# EAGLE board HotFireBoard (EAGLE 9.0.1)

Size 130.54 x 96.19 mm. Coordinates in mm from the lower left corner, seen from the top.
Outline: 0,0 130.54,0 130.54,96.19 0,96.19 0,0
Copper layers (1*16): Top 0.035mm / dielectric 1.5mm / Bottom 0.035mm
Design rules "default": minimum track width 6mil, minimum drill 0.35mm, track to track 6mil, track to pad 6mil, pad to pad 6mil, via to via 6mil, smd to smd 6mil, copper to edge 40mil, drill to drill 6mil, minimum pad ring 10mil, minimum via ring 8mil, stop-mask expansion 4mil, vias tented up to drill 0mil, thermal gap 10mil
Net classes: 1 16mil: width 0.254 mm, drill 0.254 mm, clearance 0.127 mm; 2 24mil: width 0.254 mm, drill 0.254 mm, clearance 0.127 mm; 3 32mil: width 0.254 mm, drill 0.254 mm, clearance 0.127 mm

## Footprints (pad centres in the part's own frame; a part is rotated, then mirrored left to right if it is on the bottom)
SCREWTERMINAL-5MM-2 = drill 1.3 pad 2.032 square: 1 0,0 | drill 1.3 pad 2.032: 2 5,0
0805 = smd 1.3 x 1.5: 1 -0.95,0; 2 0.95,0
PANASONIC_D = smd 3 x 1.4: + 2.4,0; - -2.4,0
0603 = smd 0.762 x 0.762: 1 -0.762,0; 2 0.762,0
PANASONIC_D' = smd 3.556 x 1.4: + 2.654,0; - -2.654,0
0603' = smd 1.016 x 1.016: 1 -0.953,0; 2 0.953,0
EIA3216 = smd 1.4 x 1.6: A 1.4,0; C -1.4,0
PN61729 = drill 0.95 octagon: 1 1.25,4.71; 2 -1.25,4.71; 3 -1.25,2.71; 4 1.25,2.71 | drill 2.2: P$1 -6.02,0; P$2 6.02,0
SOT23 = smd 1 x 1.4: 1 -0.95,-1.1; 2 0.95,-1.1; 3 0,1.1
SOD-123 = smd 1.2 x 0.7: A 1.85,0; C -1.85,0
DO214AB = smd 2.5 x 3.3: A 3.4,0; C -3.4,0
SHK20L = drill 1.321 pad 2.54 long: 1A -10.414,0; 1B -5.334,0; 2A 10.414,0; 2B 5.334,0
0603'' = smd 1.1 x 1: 1 -0.85,0; 2 0.85,0
2,8 = hole 2.8: 0,0
TQFP100 = smd 1.5 x 0.35: 1 -8,6; 2 -8,5.5; 3 -8,5; 4 -8,4.5; 5 -8,4; 6 -8,3.5; 7 -8,3; 8 -8,2.5; 9 -8,2; 10 -8,1.5; 11 -8,1; 12 -8,0.5; 13 -8,0; 14 -8,-0.5; 15 -8,-1; 16 -8,-1.5; 17 -8,-2; 18 -8,-2.5; 19 -8,-3; 20 -8,-3.5; 21 -8,-4; 22 -8,-4.5; 23 -8,-5; 24 -8,-5.5; 25 -8,-6; 51 8,-6; 52 8,-5.5; 53 8,-5; 54 8,-4.5; 55 8,-4; 56 8,-3.5; 57 8,-3; 58 8,-2.5; 59 8,-2; 60 8,-1.5; 61 8,-1; 62 8,-0.5; 63 8,0; 64 8,0.5; 65 8,1; 66 8,1.5; 67 8,2; 68 8,2.5; 69 8,3; 70 8,3.5; 71 8,4; 72 8,4.5; 73 8,5; 74 8,5.5; 75 8,6 | smd 0.35 x 1.5: 26 -6,-8; 27 -5.5,-8; 28 -5,-8; 29 -4.5,-8; 30 -4,-8; 31 -3.5,-8; 32 -3,-8; 33 -2.5,-8; 34 -2,-8; 35 -1.5,-8; 36 -1,-8; 37 -0.5,-8; 38 0,-8; 39 0.5,-8; 40 1,-8; 41 1.5,-8; 42 2,-8; 43 2.5,-8; 44 3,-8; 45 3.5,-8; 46 4,-8; 47 4.5,-8; 48 5,-8; 49 5.5,-8; 50 6,-8; 76 6,8; 77 5.5,8; 78 5,8; 79 4.5,8; 80 4,8; 81 3.5,8; 82 3,8; 83 2.5,8; 84 2,8; 85 1.5,8; 86 1,8; 87 0.5,8; 88 0,8; 89 -0.5,8; 90 -1,8; 91 -1.5,8; 92 -2,8; 93 -2.5,8; 94 -3,8; 95 -3.5,8; 96 -4,8; 97 -4.5,8; 98 -5,8; 99 -5.5,8; 100 -6,8
SO08 = smd 0.66 x 2.032: 1 -1.905,-3.073; 2 -0.635,-3.073; 3 0.635,-3.073; 4 1.905,-3.073; 5 1.905,3.073; 6 0.635,3.073; 7 -0.635,3.073; 8 -1.905,3.073
TO252 = smd 1 x 1.6: 1 -2.28,-4.8; 2 2.28,-4.8 | smd 5.4 x 6.2: 3 0,2.5
W5500 = smd 1.5 x 0.3: 1 -4.45,2.75; 2 -4.45,2.25; 3 -4.45,1.75; 4 -4.45,1.25; 5 -4.45,0.75; 6 -4.45,0.25; 7 -4.45,-0.25; 8 -4.45,-0.75; 9 -4.45,-1.25; 10 -4.45,-1.75; 11 -4.45,-2.25; 12 -4.45,-2.75; 25 4.45,-2.75; 26 4.45,-2.25; 27 4.45,-1.75; 28 4.45,-1.25; 29 4.45,-0.75; 30 4.45,-0.25; 31 4.45,0.25; 32 4.45,0.75; 33 4.45,1.25; 34 4.45,1.75; 35 4.45,2.25; 36 4.45,2.75 | smd 0.3 x 1.5: 13 -2.75,-4.45; 14 -2.25,-4.45; 15 -1.75,-4.45; 16 -1.25,-4.45; 17 -0.75,-4.45; 18 -0.25,-4.45; 19 0.25,-4.45; 20 0.75,-4.45; 21 1.25,-4.45; 22 1.75,-4.45; 23 2.25,-4.45; 24 2.75,-4.45; 37 2.75,4.45; 38 2.25,4.45; 39 1.75,4.45; 40 1.25,4.45; 41 0.75,4.45; 42 0.25,4.45; 43 -0.25,4.45; 44 -0.75,4.45; 45 -1.25,4.45; 46 -1.75,4.45; 47 -2.25,4.45; 48 -2.75,4.45
TO263-5 = smd 1.067 x 2.159: 1 -3.404,-5.791; 2 -1.702,-5.791; 3 0,-5.791; 4 1.702,-5.791; 5 3.404,-5.791 | smd 10.8 x 10.41: 6 0,2.54
2X3 = drill 1.016 pad 1.88: 1 0,0; 2 0,2.54; 3 2.54,0; 4 2.54,2.54; 5 5.08,0; 6 5.08,2.54
2-794681-0 = drill 1 pad 1.778: 1 13.5,-1.5; 2 13.5,1.5; 3 10.5,-1.5; 4 10.5,1.5; 5 7.5,-1.5; 6 7.5,1.5; 7 4.5,-1.5; 8 4.5,1.5; 9 1.5,-1.5; 10 1.5,1.5; 11 -1.5,-1.5; 12 -1.5,1.5; 13 -4.5,-1.5; 14 -4.5,1.5; 15 -7.5,-1.5; 16 -7.5,1.5; 17 -10.5,-1.5; 18 -10.5,1.5; 19 -13.5,-1.5; 20 -13.5,1.5 | hole 2.4: 15.63,0; -15.67,0
1X04 = drill 1.016 square: 1 0,0 | drill 1.016: 2 2.54,0; 3 5.08,0; 4 7.62,0
SRR1280 = smd 5.6 x 3.1: 1 0.635,5; 2 0.635,-5
L2012C = smd 1 x 1: 1 -1,0; 2 1,0
CHIPLED_0805 = smd 1.2 x 1.2: A 0,-1.05; C 0,1.05
LED-0603 = smd 0.762 x 0.762: A -0.762,0; C 0.762,0
TO-92 = drill 0.813 pad 1.88: 1 -1.27,0; 2 0,1.905; 3 1.27,0
SOT223 = smd 1.219 x 2.235: 1 -2.311,-3.099; 2 0,-3.099; 3 2.311,-3.099 | smd 3.6 x 2.2: 4 0,3.099
M0805 = smd 1.3 x 1.6: 1 -0.95,0; 2 0.95,0
S64W = drill 0.813 long: A 2.54,1.27; E -2.54,1.27; S 0,1.27
R0603 = smd 1 x 1.1: 1 -0.85,0; 2 0.85,0
SOT89 = smd 0.8 x 1.4: 1 -1.524,-1.905; 3 1.524,-1.905 | smd 0.8 x 1.9: 2 0,-1.651 | smd 2.032 x 3.65: 4 0,0.94
DTSM-6 = smd 1.55 x 1.3: 1 -3.975,2.25; 2 3.975,2.25; 3 -3.975,-2.25; 4 3.975,-2.25
HY931147C = drill 1.63 octagon: GND1 3.05,7.745; GND2 3.05,-7.745 | drill 0.9 square: P$1 8.89,5.715 | drill 0.9: P$2 6.35,4.445; P$3 8.89,3.175; P$4 6.35,1.905; P$5 8.89,0.635; P$6 6.35,-0.635; P$7 8.89,-1.905; P$8 6.35,-3.175; P$9 8.89,-4.445; P$10 6.35,-5.715 | drill 1.016: P$11 -4.08,6.625; P$12 -4.08,4.085; P$13 -4.08,-4.085; P$14 -4.08,-6.625 | hole 3.25: 0,5.715; 0,-5.715
TACTILE_SWITCH_SMD_2PIN_TINY = smd 1.4 x 1.4: 1 -2.05,0; 2 2.05,0 | hole 0.65: 0,0.9; 0,-0.9
SSOP28DB = smd 0.348 x 1.397: 1 -4.225,-3.656; 2 -3.575,-3.656; 3 -2.925,-3.656; 4 -2.275,-3.656; 5 -1.625,-3.656; 6 -0.975,-3.656; 7 -0.325,-3.656; 8 0.325,-3.656; 9 0.975,-3.656; 10 1.625,-3.656; 11 2.275,-3.656; 12 2.925,-3.656; 13 3.575,-3.656; 14 4.225,-3.656; 15 4.225,3.656; 16 3.575,3.656; 17 2.925,3.656; 18 2.275,3.656; 19 1.625,3.656; 20 0.975,3.656; 21 0.325,3.656; 22 -0.325,3.656; 23 -0.975,3.656; 24 -1.625,3.656; 25 -2.275,3.656; 26 -2.925,3.656; 27 -3.575,3.656; 28 -4.225,3.656
MSOP10 = smd 0.25 x 1: 1 -1,-2.113; 2 -0.5,-2.113; 3 0,-2.113; 4 0.5,-2.113; 5 1,-2.113; 6 1,2.113; 7 0.5,2.113; 8 0,2.113; 9 -0.5,2.113; 10 -1,2.113
SO16 = smd 0.6 x 1.2: 1 -4.445,-2.8; 2 -3.175,-2.8; 3 -1.905,-2.8; 4 -0.635,-2.8; 5 0.635,-2.8; 6 1.905,-2.8; 7 3.175,-2.8; 8 4.445,-2.8; 9 4.445,2.8; 10 3.175,2.8; 11 1.905,2.8; 12 0.635,2.8; 13 -0.635,2.8; 14 -1.905,2.8; 15 -3.175,2.8; 16 -4.445,2.8
RESONATOR-SMD = smd 0.7 x 1.7: 1 -1.2,0; 2 0,0; 3 1.2,0
RW-SH = drill 1.5: 1 -6.1,6; 2 -6.1,-6; COM -8.1,0; NC 6.1,6; NO 6.1,-6
CRYSTAL-SMD-3X2 = smd 1.3 x 1.1: 1 -1.15,-0.9; 2 1.15,-0.9; 3 1.15,0.9; 4 -1.15,0.9

## Placement (x,y rotation side)
AUX_BATT  [SCREWTERMINAL-5MM-2]  39.37,91.44 0 top
C1  0.1uF  [0805]  38.35,48.39 180 bottom
C2  0.1uF  [0805]  38.35,46.48 180 bottom
C3  0.1uF  [0805]  38.35,44.58 180 bottom
C4  0.1uF  [0805]  75.95,42.42 90 bottom
C5  47uF  [PANASONIC_D]  22.86,68.33 90 top
C6  47uF  [PANASONIC_D]  36.58,68.33 90 top
C7  0.1uF  [0805]  8.38,39.88 270 bottom
C8  0.1uF  [0805]  14.61,77.6 90 bottom
C9  4.7uF  [0805]  20.07,83.31 0 bottom
C10  0.1uF  [0805]  20.07,81.53 0 bottom
C11  0.1uF  [0805]  58.55,36.45 0 bottom
C12  0.1uF  [0805]  66.93,36.45 0 bottom
C13  0.1uF  [0805]  74.8,36.45 0 bottom
C14  0.01uF  [0805]  109.86,23.75 270 bottom
C15  0.01uF  [0805]  98.93,23.75 90 bottom
C16  0.01uF  [0805]  89.53,28.57 90 bottom
C17  0.01uF  [0805]  80.39,23.75 90 bottom
C18  0.01uF  [0805]  71.5,23.75 90 bottom
C19  0.01uF  [0805]  61.98,23.88 90 bottom
C20  0.01uF  [0805]  52.58,24.13 90 bottom
C21  0.01uF  [0805]  43.05,24 90 bottom
C22  0.01uF  [0805]  33.4,24 90 bottom
C23  0.01uF  [0805]  16.26,11.43 90 bottom
C24  47uF  [PANASONIC_D]  29.72,68.33 90 top
C25  1uF  [0805]  70.48,48.77 90 bottom
C26  0.1uF  [0805]  19.81,21.34 270 bottom
C27  1uF  [0805]  95.89,48.64 90 bottom
C28  1uF  [0805]  95.89,44.83 90 bottom
C29  1uF  [0805]  95.89,52.58 270 top
C30  0.1uF  [0805]  87,42.55 90 bottom
C31  1uF  [0805]  83.44,48.77 90 bottom
C32  1uF  [0805]  83.44,44.96 90 bottom
C33  1uF  [0805]  83.44,52.58 270 top
C34  0.1uF  [0805]  101.47,42.67 90 bottom
C35  0.1uF  [0805]  89.03,42.55 90 bottom
C36  100nF  [0603]  84.58,36.07 270 top
C37  100uF 16V  [PANASONIC_D]  88.65,36.32 90 top
C38  100uF 16V  [PANASONIC_D]  95.25,36.32 90 top
C39  1uF  [0805]  75.95,46.23 90 bottom
C40  220uF@35V  [PANASONIC_D']  51.44,69.85 0 top
C41  220uF@35V  [PANASONIC_D']  69.85,76.83 90 top
C42  100nF  [0603']  52.83,67.31 90 bottom
C43  1uF  [0805]  72.26,52.58 270 top
C44  0.1uF  [0805]  77.85,42.42 90 bottom
C45  0.1uF  [0805]  77.47,3.05 90 bottom
C46  1uF  [0805]  66.17,48.01 90 bottom
C47  1uF  [0805]  64.26,45.97 90 bottom
C48  1uF  [0805]  60.58,52.45 270 top
C49  0.1uF  [0805]  66.17,42.42 90 bottom
C50  10uF 6.3V A TANT  [EIA3216]  103.12,31.5 180 top
C51  10uF 6.3V A TANT  [EIA3216]  103.12,34.04 180 top
C52  10uF 6.3V A TANT  [EIA3216]  103.12,39.37 180 top
C53  10uF 6.3V A TANT  [EIA3216]  103.12,36.58 180 top
C54  100nF  [0603]  126.75,38.35 0 top
C55  13pF  [0603]  124.71,26.42 270 top
C56  13pF  [0603]  123.44,24.13 0 top
C57  100nF  [0603]  108.71,34.8 0 top
C58  10nF  [0603]  117.09,25.4 0 top
C59  100nF  [0603]  116.84,35.31 180 bottom
C60  100nF  [0603]  116.84,32.26 180 bottom
C61  100nF  [0603]  108.71,33.53 0 top
CONN1  USB  [PN61729]  15.24,87.63 180 top
D1  BAS40  [SOT23]  96.52,73.03 270 bottom
D2  [SOD-123]  20.07,85.09 0 bottom
D3  1N4148  [SOD-123]  111.63,28.83 270 bottom
D4  1N4148  [SOD-123]  106.05,28.7 270 bottom
D5  1N4148  [SOD-123]  102.36,28.83 270 bottom
D6  1N4148  [SOD-123]  100.46,28.83 270 bottom
D7  1N4148  [SOD-123]  93.09,28.7 270 bottom
D8  1N4148  [SOD-123]  91.31,28.7 270 bottom
D9  1N4148  [SOD-123]  83.19,29.08 270 bottom
D10  1N4148  [SOD-123]  81.41,29.08 270 bottom
D11  1N4148  [SOD-123]  74.17,29.21 270 bottom
D12  1N4148  [SOD-123]  72.39,29.21 270 bottom
D13  1N4148  [SOD-123]  64.52,29.34 270 bottom
D14  1N4148  [SOD-123]  62.74,29.34 270 bottom
D15  1N4148  [SOD-123]  53.98,29.21 270 bottom
D16  1N4148  [SOD-123]  55.75,29.21 270 bottom
D17  1N4148  [SOD-123]  47.62,29.21 270 bottom
D18  1N4148  [SOD-123]  49.53,29.21 270 bottom
D19  1N4148  [SOD-123]  35.56,29.21 270 bottom
D20  1N4148  [SOD-123]  41.91,29.08 270 bottom
D21  1N4148  [SOD-123]  23.62,29.21 270 bottom
D22  1N4148  [SOD-123]  21.84,29.21 270 bottom
D23  SS54  [DO214AB]  58.42,68.58 180 bottom
D24  BAS40  [SOT23]  96.52,62.87 90 bottom
D26  BAS40  [SOT23]  96.52,92.08 270 bottom
D27  BAS40  [SOT23]  96.52,81.92 90 bottom
D39  BAS40  [SOT23]  81.28,81.92 90 bottom
D40  BAS40  [SOT23]  81.28,73.03 270 bottom
D41  BAS40  [SOT23]  81.28,62.87 90 bottom
D42  BAS40  [SOT23]  111.76,73.03 270 bottom
D43  BAS40  [SOT23]  111.76,62.87 90 bottom
D44  BAS40  [SOT23]  111.76,92.08 270 bottom
D45  BAS40  [SOT23]  111.76,81.92 90 bottom
F1  [SHK20L]  35.56,83.82 0 top
F2  [SHK20L]  35.56,76.2 180 top
FB1  [0603'']  86.61,3.3 270 bottom
FB2  [0603'']  83.57,3.3 270 bottom
FB3  [0603'']  92.46,3.3 270 bottom
FB4  [0603'']  89.41,3.3 270 bottom
FB5  [0603'']  68.58,11.94 90 bottom
FB6  [0603'']  65.53,11.94 90 bottom
FB7  [0603'']  74.68,11.94 90 bottom
FB8  [0603'']  71.63,11.94 90 bottom
FB9  [0603'']  80.52,11.94 90 bottom
FB10  [0603'']  77.47,11.94 90 bottom
FB11  [0603'']  86.36,11.94 90 bottom
FB12  [0603'']  83.57,11.94 90 bottom
FB13  [0603'']  92.46,11.94 90 bottom
FB14  [0603'']  89.41,11.94 90 bottom
FB15  [0603'']  33.78,3.3 270 bottom
FB16  [0603'']  30.73,3.3 270 bottom
FB17  [0603'']  39.62,3.3 270 bottom
FB18  [0603'']  36.58,3.3 270 bottom
FB19  [0603'']  45.72,3.3 270 bottom
FB20  [0603'']  42.67,3.3 270 bottom
H1  MOUNT-HOLE2.8  [2,8]  5.08,5.84 0 top
H2  MOUNT-HOLE2.8  [2,8]  125.48,5.84 0 top
H3  MOUNT-HOLE2.8  [2,8]  5.08,91.44 0 top
H4  MOUNT-HOLE2.8  [2,8]  125.48,91.44 0 top
IC1  ATMEGA640-16AI  [TQFP100]  27.18,47.5 0 top
IC2  MAX31855  [SO08]  108.97,23.88 90 top
IC3  7806DT  [TO252]  34.04,66.8 180 bottom
IC4  MAX31855  [SO08]  99.95,23.88 270 top
IC5  MAX31855  [SO08]  90.68,23.88 270 top
IC6  MAX31855  [SO08]  81.41,23.88 270 top
IC7  MAX31855  [SO08]  72.39,23.88 270 top
IC8  MAX31855  [SO08]  62.99,24 270 top
IC9  MAX31855  [SO08]  53.47,24 270 top
IC10  MAX31855  [SO08]  43.94,24 270 top
IC11  MAX31855  [SO08]  34.29,24 270 top
IC12  MAX31855  [SO08]  22.61,24.13 270 top
IC13  7806DT  [TO252]  27.18,66.8 180 bottom
IC14  W5500  [W5500]  116.33,32.51 0 top
IC18  LM2596S  [TO263-5]  53.34,78.74 0 bottom
ICSP  FEMALE 2x3  [2X3]  5.84,45.47 90 top
J1  2-794681-0  [2-794681-0]  96.27,16.76 180 top
J2  2-794681-0  [2-794681-0]  61.72,16.76 0 top
J3  2-794681-0  [2-794681-0]  27.18,16.76 0 top
J4  2-794681-0  [2-794681-0]  78.99,7.62 0 top
J5  2-794681-0  [2-794681-0]  44.2,7.62 0 top
J7  FEMALE 2x3  [2X3]  21.59,74.3 90 top
JP1  PoE Header  [1X04]  128.78,60.71 180 top
KEY_SW  [SCREWTERMINAL-5MM-2]  64.77,91.44 0 top
L1  SRR1280-330mH  [SRR1280]  53.34,80.01 0 top
L2  1uH 250mA 0805  [L2012C]  108.46,31.75 180 top
L3  1uH 250mA 0805  [L2012C]  113.03,44.96 90 bottom
LEAD_ACID  [SCREWTERMINAL-5MM-2]  52.07,91.44 0 top
LED1  GREEN  [CHIPLED_0805]  2.67,85.47 90 top
LED2  YELLOW  [CHIPLED_0805]  2.67,83.82 90 top
LED3  BLUE  [CHIPLED_0805]  2.67,82.3 270 top
LED4  RED  [CHIPLED_0805]  2.67,80.77 270 top
LED5  YELLOW  [LED-0603]  128.02,34.04 180 top
LED6  GREEN  [LED-0603]  128.02,32 180 top
LED7  BLUE  [LED-0603]  128.02,37.08 0 top
LED8  GREEN  [LED-0603]  128.02,28.96 180 top
LED9  YELLOW  [LED-0603]  128.02,29.97 180 top
POWERSUPPLY  [SCREWTERMINAL-5MM-2]  26.67,91.44 0 top
Q1  s8550  [TO-92]  100.46,54.86 180 top
Q2  s8550  [TO-92]  88.01,54.86 180 top
Q3  s8550  [TO-92]  76.83,54.86 180 top
Q4  s8550  [TO-92]  65.15,54.86 180 top
Q5  MMBT2222  [SOT223]  96.52,87 90 bottom
Q6  MMBT2222  [SOT223]  96.52,67.94 90 bottom
Q7  MMBT2222  [SOT223]  81.28,67.94 90 bottom
Q8  MMBT2222  [SOT223]  111.76,67.94 90 bottom
Q9  MMBT2222  [SOT223]  111.76,87 90 bottom
R1  1m  [0805]  22.35,34.54 90 top
R2  27  [0805]  25.91,34.54 270 top
R3  10k  [0805]  4.32,39.88 90 bottom
R4  1k  [0805]  4.83,85.6 180 bottom
R5  1k  [0805]  4.83,83.82 180 bottom
R6  10k  [0805]  7.75,61.34 180 top
R7  10k  [0805]  3.94,59.56 0 top
R8  680  [0805]  4.83,82.04 0 bottom
R9  680  [0805]  4.83,80.26 180 bottom
R10  10k  [0805]  7.75,55.75 0 top
R11  10k  [0805]  3.94,61.34 180 top
R12  10k  [0805]  54.86,36.2 270 bottom
R13  10k  [0805]  58.55,33.27 270 bottom
R14  10k  [0805]  7.75,57.66 0 top
R15  10k  [0805]  3.94,57.78 180 top
R16  10k  [0805]  63.25,36.2 270 bottom
R17  10k  [0805]  7.75,59.56 0 top
R18  10k  [0805]  3.94,56.01 180 top
R19  10k  [0805]  3.94,53.98 180 top
R20  10k  [0805]  109.86,28.7 270 bottom
R21  10k  [0805]  107.82,28.7 270 bottom
R22  10k  [0805]  100.84,23.75 90 bottom
R23  10k  [0805]  101.85,20.95 180 bottom
R24  10k  [0805]  91.57,23.75 90 bottom
R25  10k  [0805]  95.25,20.57 0 bottom
R26  10k  [0805]  82.3,23.75 90 bottom
R27  10k  [0805]  85.98,20.57 0 bottom
R28  10k  [0805]  73.41,23.75 90 bottom
R29  10k  [0805]  76.83,20.57 0 bottom
R30  10k  [0805]  63.88,23.88 90 bottom
R31  10k  [0805]  67.69,20.45 0 bottom
R32  10k  [0805]  54.48,24.13 90 bottom
R33  10k  [0805]  58.29,20.7 0 bottom
R34  10k  [0805]  44.83,24 90 bottom
R35  10k  [0805]  48.51,20.7 0 bottom
R36  10k  [0805]  35.18,24 90 bottom
R37  10k  [0805]  37.72,20.7 0 bottom
R38  10k  [0805]  23.5,24.26 90 bottom
R39  10k  [0805]  21.72,24.26 90 bottom
R40  1k  [0805]  16.76,21.34 270 bottom
R41  8.2k  [0805]  100.46,45.97 0 bottom
R42  20k  [0805]  100.46,48.26 0 bottom
R43  1k  [0805]  40.64,21.34 270 bottom
R44  8.2k  [0805]  88.01,46.1 0 bottom
R45  20k  [0805]  88.01,48.39 0 bottom
R46  1K8  [0603]  125.48,37.08 0 top
R47  680R  [0603]  125.48,32 180 top
R48  680R  [0603]  125.48,28.96 180 top
R49  680R  [0603]  125.48,29.97 180 top
R50  1K  [0603]  125.48,34.04 180 top
R51  1M  [0603]  120.9,24.13 0 top
R52  49R9 1%  [0603]  114.3,34.29 0 bottom
R53  49R9 1%  [0603]  114.3,35.31 180 bottom
R54  49R9 1%  [0603]  114.3,32.26 0 bottom
R55  49R9 1%  [0603]  114.3,33.27 180 bottom
R56  12K3 1%  [0603]  114.3,30.73 0 bottom
R57  680R  [0603]  125.48,33.02 0 top
R58  680R  [0603]  125.48,30.99 0 top
R59  10K  [0603]  122.17,38.1 90 top
R75  10k  [0805]  109.73,12.19 270 bottom
R76  10k  [0805]  106.68,12.19 270 bottom
R77  10k  [0805]  103.89,12.19 270 bottom
R78  10k  [0805]  100.84,12.19 270 bottom
R79  10k  [0805]  97.79,12.19 270 bottom
R80  10K  [M0805]  51.82,3.05 270 bottom
R81  10K  [M0805]  57.66,3.05 270 bottom
R82  1k  [0805]  28.7,21.34 270 bottom
R83  8.2k  [0805]  72.26,45.09 270 bottom
R84  10k  [S64W]  66.04,85.72 180 top
R85  330  [R0603]  48.01,72.64 90 bottom
R86  20k  [0805]  72.26,48.77 90 bottom
R88  1k  [0805]  74.42,3.05 90 bottom
R89  8.2k  [0805]  58.55,47.88 90 bottom
R90  20k  [0805]  60.45,47.88 90 bottom
REG1  LD1117-SOT89  [SOT89]  109.22,53.34 0 top
REG2  LD1117-SOT223  [SOT223]  108.71,44.96 0 top
S1  DTSM-6  [DTSM-6]  6.35,39.88 0 top
SCK1  HY931147C-RJ45  [HY931147C]  123.95,48.51 180 top
SW1  RESET  [TACTILE_SWITCH_SMD_2PIN_TINY]  108.97,37.85 180 top
U1  [SSOP28DB]  11.68,76.83 0 top
U2  ADS1115IDGST  [MSOP10]  58.55,34.04 270 top
U3  ADS1115IDGST  [MSOP10]  66.93,34.04 270 top
U4  ADS1115IDGST  [MSOP10]  74.8,34.04 270 top
U5  HX711  [SO16]  100.46,46.48 270 top
U6  HX711  [SO16]  88.01,46.48 270 top
U7  HX711  [SO16]  76.83,46.48 270 top
U8  HX711  [SO16]  65.15,46.48 270 top
U$1  RESONATORSMD  [RESONATOR-SMD]  24.13,34.54 270 top
U$15  RW-SH  [RW-SH]  96.52,67.31 90 top
U$17  RW-SH  [RW-SH]  81.28,67.31 90 top
U$19  RW-SH  [RW-SH]  111.76,67.31 90 top
U$21  RW-SH  [RW-SH]  111.76,86.36 90 top
U$128  RW-SH  [RW-SH]  96.52,86.36 90 top
U$138  RW-SH  [RW-SH]  81.28,86.36 90 top
XTL1  25MHZ  [CRYSTAL-SMD-3X2]  122.17,26.42 0 top

## Library data of the parts
AUX_BATT KEY_SW LEAD_ACID POWERSUPPLY = SparkFun-Connectors; SF_SKU: PRT-08432
C1-C4 C7-C23 C25-C35 C39-C41 C43-C49 D2-D22 FB1-FB20 LED1-LED4 R1-R45 R75-R79 R82 R83 R86 R88-R90 U1-U4 = microbuilder
C5 C6 C24 = rcl; SPICEPREFIX: C
C36 C50-C61 JP1 LED5-LED9 R46-R59 REG1 REG2 = freetronics
C37 C38 L2 L3 = rcl
C42 = cap-master
CONN1 = dodolcd
D1 D24 D26 D27 D39-D45 = diode
D23 = s3x_10; MF: Fairchild; MPN: S3G; OC_FARNELL: 2454094; OC_NEWARK: 58K2397
F1 F2 = fuse; OC_FARNELL: unknown; OC_NEWARK: unknown
H1-H4 = holes
IC1 = atmel-2005
IC2-IC13 R80 R81 R85 = adafruit
IC14 = W5500
IC18 = national-semiconductor; MF: NATIONAL SEMICONDUCTOR; MPN: LM2596S-ADJ/NOPB; OC_FARNELL: 9494367; OC_NEWARK: 41K3842
ICSP J7 = SparkFun-Connectors; PROD_ID: CONN-11566
J1-J5 = con-amp
L1 = inductor-bourns
Q1-Q4 = User-Submitted
Q5-Q9 U$1 = SparkFun
R84 = pot
S1 = switch-tact
SCK1 XTL1 = freetronics-jon
SW1 = freetronics-master-v1
U5-U8 = SparkFun-IC-Conversion; PROD_ID: IC-12445
U$15 U$17 U$19 U$21 U$128 U$138 = goodsky1

## Nets
1V8_OUT: C50.A L2.1
1V8A: C51.A C57.1 L2.2
3.3V [16mil]: C8.2 C24.+ IC2.4 IC4.4 IC5.4 IC6.4 IC7.4 IC8.4 IC9.4 IC10.4 IC11.4 IC12.4 IC13.2 R20.1 R21.1 R22.1 R23.1 R24.1 R25.1 R26.1 R27.1 R28.1 R29.1 R30.1 R31.1 R32.1 R33.1 R34.1 R35.1 R36.1 R37.1 R38.1 R39.1 U1.17
3V3A: C53.A C61.1 L3.2 SCK1.P$3 SCK1.P$4
3V3A1: C58.1
3V3D: C38.+ C52.A L3.1 LED5.A LED6.A LED8.A LED9.A R59.2 REG1.2 REG1.4 REG2.2 REG2.4 SCK1.P$11 SCK1.P$13
5.0V [16mil]: C1.1 C2.1 C3.1 C6.+ C11.2 C12.2 C13.2 C29.2 C33.2 C43.2 C48.2 D2.C IC1.10 IC1.31 IC1.61 IC1.80 IC1.100 IC3.2 ICSP.2 J1.11 J1.13 J1.15 J1.17 J1.19 J3.4 J3.12 J3.20 J4.15 LED3.A LED4.A Q1.1 Q2.1 Q3.1 Q4.1 R3.2 R4.2 R6.2 R7.2 R10.1 R11.1 R12.1 R14.1 R15.1 R16.1 R17.1 R18.1 R19.1 U1.4 U1.20 U2.8 U3.1 U3.8 U4.8 U5.1 U5.16 U6.1 U6.16 U7.1 U7.16 U8.1 U8.16
5V: C54.1 R46.1
+24V [24mil]: J2.1 J2.4 J2.7 J2.10 J2.13 J2.16 J2.19 J3.5 J3.11 J3.17 U$15.NO U$17.NO U$19.NO U$21.NO U$128.NO
ACTLED: IC14.27 R50.2
ADC0: IC1.97
ADC1: IC1.96
ADC2: IC1.95
ADC3: IC1.94
ADC4: IC1.93
ADC5: IC1.92
ADC6: IC1.91
ADC7: IC1.90
ADC8: IC1.89
ADC9: IC1.88
ADC10: IC1.87
ADC11: IC1.86
ADC12: IC1.85
ADC13: IC1.84
ADC14: IC1.83
ADC15: IC1.82
ARD_SOL1_WSV_2: IC1.42 Q5.1
ARD_SOL2_NV_2: IC1.41 Q6.1
ARD_SOL2_OV_5: Q8.1
ARD_SOL3_OV_4: IC1.40 Q7.1
ARD_SOL4_OV_5: IC1.39
ARD_SOL5: IC1.38 Q9.1
AREF: IC1.98
AVDD: C25.2 C27.2 C31.2 C46.2 Q1.3 Q2.3 Q3.3 Q4.3 R42.2 R45.2 R86.2 R90.2 U5.3 U6.3 U7.3 U8.3
D0/RX0: IC1.2 U1.1
D1/TX0: IC1.3 U1.5
D3: IC1.7
D10_SS: IC14.32 R59.1
D37: IC1.53
D38: IC1.50
D+: CONN1.3 U1.15
D-: CONN1.2 U1.16
ETHERNET1: IC1.37
ETHERNET2: IC1.36
ETHERNET3: IC1.35
ETHERNET4: IC1.64
ETHERNET5: IC1.63
ETHERNET6: IC1.18
ETHERNET7: IC1.17
ETHERNET8: IC1.13
ETHERNET9: IC1.12
ETHERNET10: IC1.24
ETHERNET11: IC1.23 R5.2
ETHERNET12: IC1.19
ETHERNET13: IC1.70
ETHERNET14: IC1.52
ETHERNET15: IC1.51
ETHERNET16: IC1.6
EXRES1: IC14.10 R56.2
FDXLED: IC14.26 R47.2 R57.1
GND [32mil]: AUX_BATT.1 C1.2 C2.2 C3.2 C5.- C6.- C8.1 C9.1 C10.1 C11.1 C12.1 C13.1 C24.- C29.1 C33.1 C36.2 C37.- C38.- C40.- C41.- C42.1 C43.1 C48.1 C50.C C51.C C52.C C53.C C54.2 C55.2 C56.2 C57.2 C58.2 C59.2 C60.2 C61.2 CONN1.4 CONN1.P$1 CONN1.P$2 D1.1 D23.A D26.1 D39.1 D40.1 D42.1 D44.1 IC1.11 IC1.32 IC1.62 IC1.81 IC1.99 IC2.1 IC3.3 IC4.1 IC5.1 IC6.1 IC7.1 IC8.1 IC9.1 IC10.1 IC11.1 IC12.1 IC13.3 IC14.3 IC14.9 IC14.14 IC14.16 IC14.19 IC14.48 IC18.3 IC18.5 ICSP.6 J1.2 J1.4 J1.6 J1.8 J1.10 J2.3 J2.6 J2.9 J2.12 J2.15 J2.18 J3.1 J3.6 J3.7 J3.13 J3.14 J3.19 J4.9 J4.17 JP1.1 KEY_SW.1 LEAD_ACID.1 LED1.C LED2.C LED7.C POWERSUPPLY.1 R13.2 R56.1 R75.2 R76.2 R77.2 R78.2 R79.2 R80.2 R81.2 R85.1 REG1.1 REG2.1 S1.1 S1.2 SCK1.GND1 SCK1.GND2 SW1.2 U1.7 U1.18 U1.21 U1.25 U2.3 U3.3 U4.3 U5.14 U5.15 U6.14 U6.15 U7.14 U7.15 U8.14 U8.15 U$1.2 U$15.2 U$17.2 U$19.2 U$21.2 U$128.2 U$138.2 XTL1.2 XTL1.4
IGNITER+ [32mil]: J5.20 U$138.COM
IGNITER-: J5.18 KEY_SW.2
IGNITER_SW- [32mil]: D39.3 J5.6 U$138.1
INT: IC14.36
LC1_A+: J3.18 R40.2
LC1_A-: C26.2 J3.16 U5.7
LC2_A+: J3.10 R82.2
LC2_A-: C4.2 J3.8 U7.7
LC3_A+: J3.2 R43.2
LC3_A-: C30.2 J4.19 U6.7
LC4_A+: J4.13 R88.2
LC4_A-: C45.2 J4.11 U8.7
LEAD_ACID+ [32mil]: LEAD_ACID.2 U$138.NO
LINKLED: IC14.25 R49.2 R58.1
LOADCELL_1_DOUT: IC1.5 U5.12 U7.12
LOADCELL_1_SCK: IC1.15 U5.11 U7.11
LOADCELL_2_DOUT: IC1.1 U6.12 U8.12
LOADCELL_2_SCK: IC1.16 U6.11 U8.11
LS1: IC1.58 J1.20 R75.1
LS2: IC1.57 J1.18 R76.1
LS3: IC1.56 J1.16 R77.1
LS4: IC1.55 J1.14 R78.1
LS5: IC1.54 J1.12 R79.1
MISO: IC1.22 IC14.34 ICSP.1
MOSI: IC1.21 IC14.35 ICSP.4
N$1: IC1.65
N$2: IC1.66
N$3: R1.1 R2.2 U$1.3
N$4: IC1.67
N$5: IC1.68
N$6: IC1.69
N$7: IC1.79
N$8: IC1.27
N$9: IC1.9
N$10: IC1.49
N$11: IC1.48
N$12: IC1.47
N$13: IC1.14
N$14: IC1.8
N$15 [24mil]: F1.1A POWERSUPPLY.2
N$16 [24mil]: AUX_BATT.2 F2.1A
N$17 [24mil]: F1.2A J7.1
N$18: IC1.4
N$19: LED1.A R4.1
N$20: LED2.A R5.1
N$21: LED3.C R8.1
N$22: R9.2 U1.22
N$23: R8.2 U1.23
N$24: LED4.C R9.1
N$25: IC1.29
N$26: IC1.28
N$27: C14.1 FB2.2 IC2.3
N$28: U1.26
N$29: U1.11
N$30: U1.3
N$31: C7.1 U1.2
N$32: C14.2 FB1.2 IC2.2
N$33 [24mil]: F2.2A J7.3
N$34: D3.A IC2.6 R20.2
N$35: C59.1 R52.1 R53.2
N$36: C4.1 R82.1 U7.8
N$37: D23.C IC18.2 L1.1
N$38: R12.2 U2.2
N$39: IC18.4 R84.A R84.S R85.2
N$40: R16.2 U3.2
N$41: R13.1 U2.1
N$42: R57.2 SCK1.P$14
N$43: JP1.3 SCK1.P$9
N$44: R19.2 U4.2
N$45: C25.1 C39.2 R83.2 U7.5
N$46: JP1.2 SCK1.P$10
N$47: D4.A IC2.5 R21.2
N$48: C15.2 FB3.2 IC4.2
N$49: C39.1 U7.6
N$50: R83.1 R86.1 U7.4
N$51: C15.1 FB4.2 IC4.3
N$52: IC14.31
N$54: D5.A IC4.6 R22.2
N$55: D6.A IC4.5 R23.2
N$56: C16.2 FB5.2 IC5.2
N$57: C16.1 FB6.2 IC5.3
N$60: D7.A IC5.6 R24.2
N$61: D8.A IC5.5 R25.2
N$62: C17.2 FB7.2 IC6.2
N$63: C17.1 FB8.2 IC6.3
N$66: D9.A IC6.6 R26.2
N$67: D10.A IC6.5 R27.2
N$68: C18.2 FB9.2 IC7.2
N$69: C18.1 FB10.2 IC7.3
N$71: IC14.30
N$72: D11.A IC7.6 R28.2
N$73: D12.A IC7.5 R29.2
N$74: C19.2 FB11.2 IC8.2
N$75: C19.1 FB12.2 IC8.3
N$78: D13.A IC8.6 R30.2
N$79: D14.A IC8.5 R31.2
N$80: C20.2 FB13.2 IC9.2
N$81: C20.1 FB14.2 IC9.3
N$84: D15.A IC9.6 R32.2
N$85: D16.A IC9.5 R33.2
N$86: C21.2 FB15.2 IC10.2
N$87: C21.1 FB16.2 IC10.3
N$90: D17.A IC10.6 R34.2
N$91: D18.A IC10.5 R35.2
N$92: C22.2 FB17.2 IC11.2
N$93: C22.1 FB18.2 IC11.3
N$96: D19.A IC11.6 R36.2
N$97: D20.A IC11.5 R37.2
N$98: C23.2 FB19.2 IC12.2
N$99: C23.1 FB20.2 IC12.3
N$102: D21.A IC12.6 R38.2
N$103: D22.A IC12.5 R39.2
N$105: C26.1 R40.1 U5.8
N$108: C27.1 C28.2 R41.2 U5.5
N$109: C28.1 U5.6
N$110: R41.1 R42.1 U5.4
N$111: Q1.2 U5.2
N$112: C30.1 R43.1 U6.8
N$114: C31.1 C32.2 R44.2 U6.5
N$115: C32.1 U6.6
N$116: R44.1 R45.1 U6.4
N$117: Q2.2 U6.2
N$118: C34.1 U5.9
N$119: C34.2 U5.10
N$121: C35.1 U6.9
N$122: C35.2 U6.10
N$124: D26.3 Q5.3 U$128.1
N$126: D1.3 Q6.3 U$15.1
N$128: D40.3 Q7.3 U$17.1
N$130: D42.3 Q8.3 U$19.1
N$131: LED7.A R46.2
N$132: D44.3 Q9.3 U$21.1
N$157: Q3.2 U7.2
N$158: C44.1 U7.9
N$160: C44.2 U7.10
N$163: C45.1 R88.1 U8.8
N$165: C46.1 C47.2 R89.2 U8.5
N$166: C47.1 U8.6
N$167: R89.1 R90.1 U8.4
N$168: Q4.2 U8.2
N$169: C49.1 U8.9
N$170: C49.2 U8.10
N$321: C60.1 R54.1 R55.2
N$323: LED8.C R48.1
N$325: LED9.C R49.1
N$327: LED6.C R47.1
N$329: LED5.C R50.1
N$332: R58.2 SCK1.P$12
NV_2_SW- [24mil]: D24.1 J5.14
OV_4_SW- [24mil]: D41.1 J5.12
OV_5_SW- [24mil]: D43.1 J5.10
PT1: J2.17 U2.4
PT2: J2.11 U2.5
PT3: J2.5 U2.6
PT4: J2.20 U2.7
PT5: J2.14 U3.4
PT6: J2.8 U3.5
PT7: J2.2 U3.6
PT8: J3.15 U3.7
PT9: J3.9 U4.4
PT10: J3.3 U4.5
PT11: U4.6
PT12: U4.7
RESET: C7.2 IC1.30 ICSP.5 R3.1 S1.3 S1.4 SW1.1
RXD1: IC1.45
RXIN: IC14.5 R55.1 SCK1.P$2
RXIP: IC14.6 R54.2 SCK1.P$1
SCK: IC1.20 IC14.33 ICSP.3
SCL: IC1.43 R6.1 R10.2 R14.2 R17.2 U2.10 U3.10 U4.10
SDA: IC1.44 R7.1 R11.2 R15.2 R18.2 U2.9 U3.9 U4.1 U4.9
SOL1_WSV_2: D27.3 J1.9 U$128.COM
SOL2_NSV_2: D24.3 J1.7 U$15.COM
SOL3_OSV_4: D41.3 J1.5 U$17.COM
SOL4_OSV_5: D43.3 J1.3 U$19.COM
SOL5_AUX_1: D45.3 J1.1 U$21.COM
SOL_5_SW- [24mil]: D45.1 J5.8
SOL_VIN: C41.+ L1.2 Q5.2 Q6.2 Q7.2 Q8.2 Q9.2 R84.E
SPDLED: IC14.24 R48.2
TC1+: FB1.1 J4.5
TC1-: FB2.1 J4.7
TC1_CS: D3.C IC1.71
TC2+: FB3.1 J4.1
TC2-: FB4.1 J4.3
TC2_CS: D5.C IC1.72
TC3+: FB5.1 J4.18
TC3-: FB6.1 J4.20
TC3_CS: D7.C IC1.73
TC4+: FB7.1 J4.14
TC4-: FB8.1 J4.16
TC4_CS: D9.C IC1.74
TC5+: FB9.1 J4.10
TC5-: FB10.1 J4.12
TC5_CS: D11.C IC1.75
TC6+: FB11.1 J4.6
TC6-: FB12.1 J4.8
TC6_CS: D13.C IC1.76
TC7+: FB13.1 J4.2
TC7-: FB14.1 J4.4
TC7_CS: D15.C IC1.77
TC8+: FB15.1 J5.17
TC8-: FB16.1 J5.19
TC8_CS: D17.C IC1.78
TC9+: FB17.1 J5.13
TC9-: FB18.1 J5.15
TC9_CS: D19.C IC1.60
TC10+: FB19.1 J5.9
TC10-: FB20.1 J5.11
TC10_CS: D21.C IC1.59
TC_DO: IC1.26 IC2.7 IC4.7 IC5.7 IC6.7 IC7.7 IC8.7 IC9.7 IC10.7 IC11.7 IC12.7
TC_SCK: D4.C D6.C D8.C D10.C D12.C D14.C D16.C D18.C D20.C D22.C IC1.25
THERM1+: J5.7
THERM1-: J5.5 R80.1
THERM2+: J5.3
THERM2-: J5.1 R81.1
TXD1: IC1.46
TXON: IC14.1 R53.1 SCK1.P$6
TXOP: IC14.2 R52.2 SCK1.P$5
VIN [24mil]: C5.+ C36.1 C37.+ C40.+ C42.2 IC3.1 IC13.1 IC18.1 J7.2 J7.4 J7.6 JP1.4 REG1.3 REG2.3
VUSB [16mil]: C9.2 C10.2 CONN1.1 D2.A
WSV_2_SW- [24mil]: D27.1 J5.16
XTAL1: IC1.34 R2.1
XTAL2: IC1.33 R1.2 U$1.1
XTLN: C56.1 R51.2 XTL1.1
XTLP: C55.1 R51.1 XTL1.3

## Tracks (layer width: path | path; a pad name or v marks a point on that pad's centre or on a via)
1V8_OUT  (1 unrouted)
1V8A  (2 unrouted)
3.3V  (33 unrouted)
3V3A  (4 unrouted)
3V3D  (13 unrouted)
5.0V  (60 unrouted)
5V  (1 unrouted)
+24V  (14 unrouted)
ACTLED  (1 unrouted)
ARD_SOL1_WSV_2  (1 unrouted)
ARD_SOL2_NV_2  (1 unrouted)
ARD_SOL3_OV_4  (1 unrouted)
ARD_SOL5  (1 unrouted)
AVDD  (15 unrouted)
D0/RX0  (1 unrouted)
D1/TX0  (1 unrouted)
D10_SS  (1 unrouted)
D+  (1 unrouted)
D-  (1 unrouted)
ETHERNET11  (1 unrouted)
EXRES1  (1 unrouted)
FDXLED  (2 unrouted)
GND  (137 unrouted)
IGNITER+  (1 unrouted)
IGNITER-  (1 unrouted)
IGNITER_SW-  (2 unrouted)
LC1_A+  (1 unrouted)
LC1_A-  (2 unrouted)
LC2_A+  (1 unrouted)
LC2_A-  (2 unrouted)
LC3_A+  (1 unrouted)
LC3_A-  (2 unrouted)
LC4_A+  (1 unrouted)
LC4_A-  (2 unrouted)
LEAD_ACID+  (1 unrouted)
LINKLED  (2 unrouted)
LOADCELL_1_DOUT  (2 unrouted)
LOADCELL_1_SCK  (2 unrouted)
LOADCELL_2_DOUT  (2 unrouted)
LOADCELL_2_SCK  (2 unrouted)
LS1  (2 unrouted)
LS2  (2 unrouted)
LS3  (2 unrouted)
LS4  (2 unrouted)
LS5  (2 unrouted)
MISO  (2 unrouted)
MOSI  (2 unrouted)
N$3  (2 unrouted)
N$15  (1 unrouted)
N$16  (1 unrouted)
N$17  (1 unrouted)
N$19  (1 unrouted)
N$20  (1 unrouted)
N$21  (1 unrouted)
N$22  (1 unrouted)
N$23  (1 unrouted)
N$24  (1 unrouted)
N$27  (2 unrouted)
N$31  (1 unrouted)
N$32  (2 unrouted)
N$33  (1 unrouted)
N$34  (2 unrouted)
N$35  (2 unrouted)
N$36  (2 unrouted)
N$37  (2 unrouted)
N$38  (1 unrouted)
N$39  (3 unrouted)
N$40  (1 unrouted)
N$41  (1 unrouted)
N$42  (1 unrouted)
N$43  (1 unrouted)
N$44  (1 unrouted)
N$45  (3 unrouted)
N$46  (1 unrouted)
N$47  (2 unrouted)
N$48  (2 unrouted)
N$49  (1 unrouted)
N$50  (2 unrouted)
N$51  (2 unrouted)
N$54  (2 unrouted)
N$55  (2 unrouted)
N$56  (2 unrouted)
N$57  (2 unrouted)
N$60  (2 unrouted)
N$61  (2 unrouted)
N$62  (2 unrouted)
N$63  (2 unrouted)
N$66  (2 unrouted)
N$67  (2 unrouted)
N$68  (2 unrouted)
N$69  (2 unrouted)
N$72  (2 unrouted)
N$73  (2 unrouted)
N$74  (2 unrouted)
N$75  (2 unrouted)
N$78  (2 unrouted)
N$79  (2 unrouted)
N$80  (2 unrouted)
N$81  (2 unrouted)
N$84  (2 unrouted)
N$85  (2 unrouted)
N$86  (2 unrouted)
N$87  (2 unrouted)
N$90  (2 unrouted)
N$91  (2 unrouted)
N$92  (2 unrouted)
N$93  (2 unrouted)
N$96  (2 unrouted)
N$97  (2 unrouted)
N$98  (2 unrouted)
N$99  (2 unrouted)
N$102  (2 unrouted)
N$103  (2 unrouted)
N$105  (2 unrouted)
N$108  (3 unrouted)
N$109  (1 unrouted)
N$110  (2 unrouted)
N$111  (1 unrouted)
N$112  (2 unrouted)
N$114  (3 unrouted)
N$115  (1 unrouted)
N$116  (2 unrouted)
N$117  (1 unrouted)
N$118  (1 unrouted)
N$119  (1 unrouted)
N$121  (1 unrouted)
N$122  (1 unrouted)
N$124  (2 unrouted)
N$126  (2 unrouted)
N$128  (2 unrouted)
N$130  (2 unrouted)
N$131  (1 unrouted)
N$132  (2 unrouted)
N$157  (1 unrouted)
N$158  (1 unrouted)
N$160  (1 unrouted)
N$163  (2 unrouted)
N$165  (3 unrouted)
N$166  (1 unrouted)
N$167  (2 unrouted)
N$168  (1 unrouted)
N$169  (1 unrouted)
N$170  (1 unrouted)
N$321  (2 unrouted)
N$323  (1 unrouted)
N$325  (1 unrouted)
N$327  (1 unrouted)
N$329  (1 unrouted)
N$332  (1 unrouted)
NV_2_SW-  (1 unrouted)
OV_4_SW-  (1 unrouted)
OV_5_SW-  (1 unrouted)
PT1  (1 unrouted)
PT2  (1 unrouted)
PT3  (1 unrouted)
PT4  (1 unrouted)
PT5  (1 unrouted)
PT6  (1 unrouted)
PT7  (1 unrouted)
PT8  (1 unrouted)
PT9  (1 unrouted)
PT10  (1 unrouted)
RESET  (6 unrouted)
RXIN  (2 unrouted)
RXIP  (2 unrouted)
SCK  (2 unrouted)
SCL  (7 unrouted)
SDA  (8 unrouted)
SOL1_WSV_2  (2 unrouted)
SOL2_NSV_2  (2 unrouted)
SOL3_OSV_4  (2 unrouted)
SOL4_OSV_5  (2 unrouted)
SOL5_AUX_1  (2 unrouted)
SOL_5_SW-  (1 unrouted)
SOL_VIN  (7 unrouted)
SPDLED  (1 unrouted)
TC1+  (1 unrouted)
TC1-  (1 unrouted)
TC1_CS  (1 unrouted)
TC2+  (1 unrouted)
TC2-  (1 unrouted)
TC2_CS  (1 unrouted)
TC3+  (1 unrouted)
TC3-  (1 unrouted)
TC3_CS  (1 unrouted)
TC4+  (1 unrouted)
TC4-  (1 unrouted)
TC4_CS  (1 unrouted)
TC5+  (1 unrouted)
TC5-  (1 unrouted)
TC5_CS  (1 unrouted)
TC6+  (1 unrouted)
TC6-  (1 unrouted)
TC6_CS  (1 unrouted)
TC7+  (1 unrouted)
TC7-  (1 unrouted)
TC7_CS  (1 unrouted)
TC8+  (1 unrouted)
TC8-  (1 unrouted)
TC8_CS  (1 unrouted)
TC9+  (1 unrouted)
TC9-  (1 unrouted)
TC9_CS  (1 unrouted)
TC10+  (1 unrouted)
TC10-  (1 unrouted)
TC10_CS  (1 unrouted)
TC_DO  (10 unrouted)
TC_SCK  (10 unrouted)
THERM1-  (1 unrouted)
THERM2-  (1 unrouted)
TXON  (2 unrouted)
TXOP  (2 unrouted)
VIN  (13 unrouted)
VUSB  (3 unrouted)
WSV_2_SW-  (1 unrouted)
XTAL1  (1 unrouted)
XTAL2  (2 unrouted)
XTLN  (2 unrouted)
XTLP  (2 unrouted)